# EAGLE board pcb_rt4_transmitter (EAGLE 6.5.0)
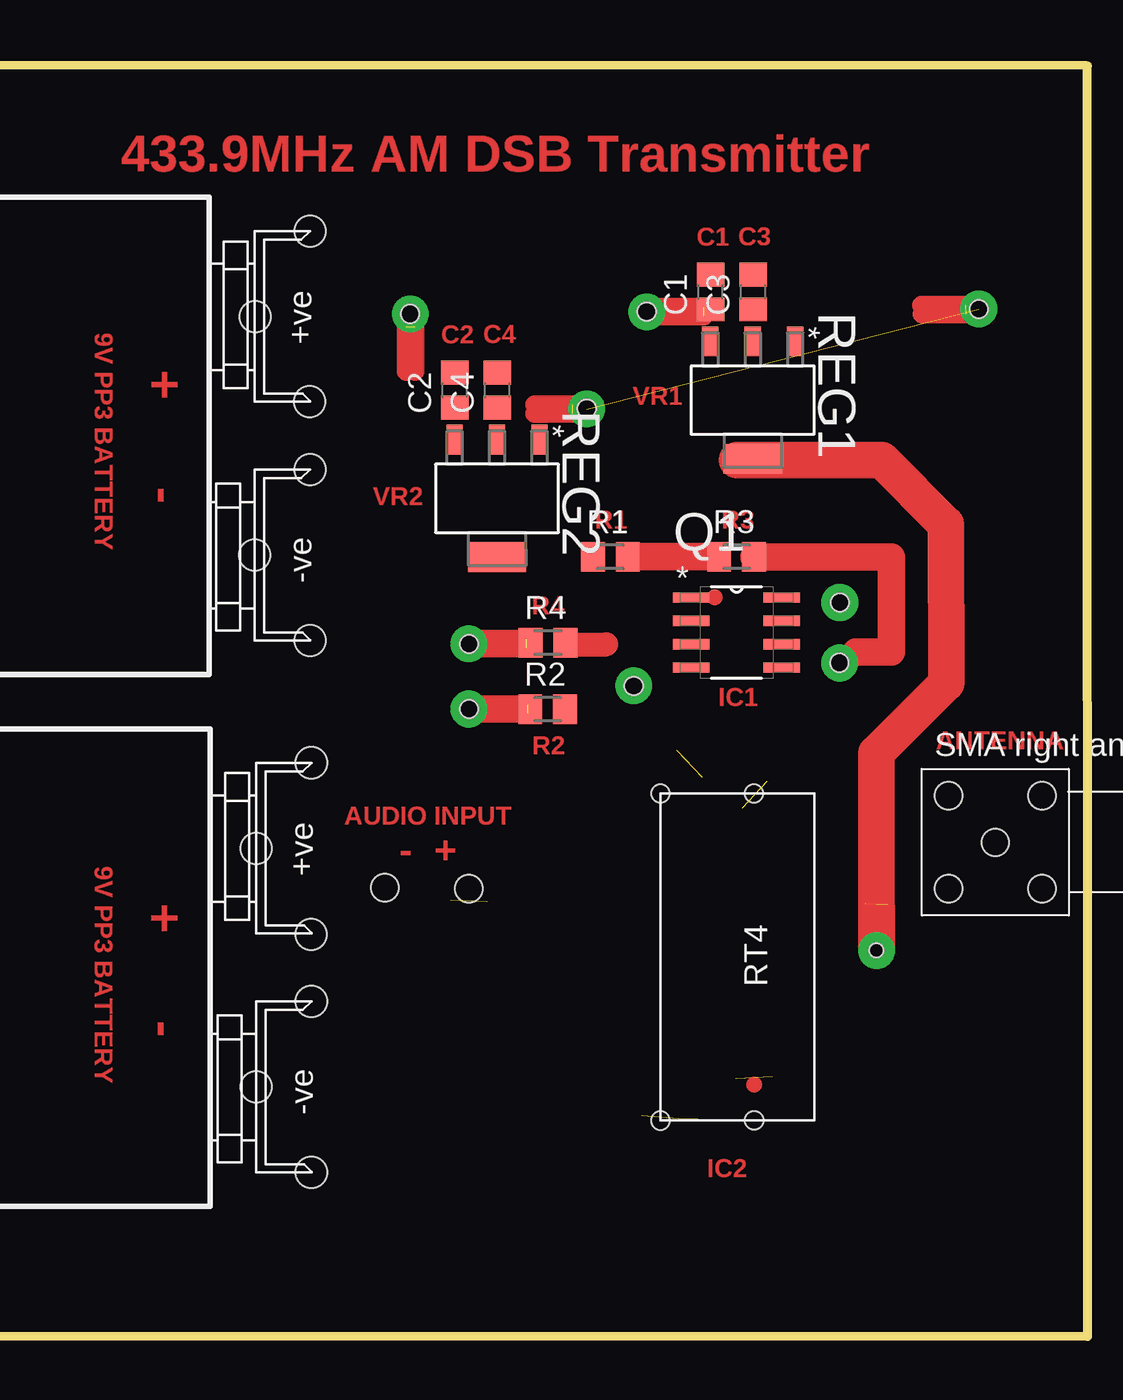
[diagram p0: board, top side]
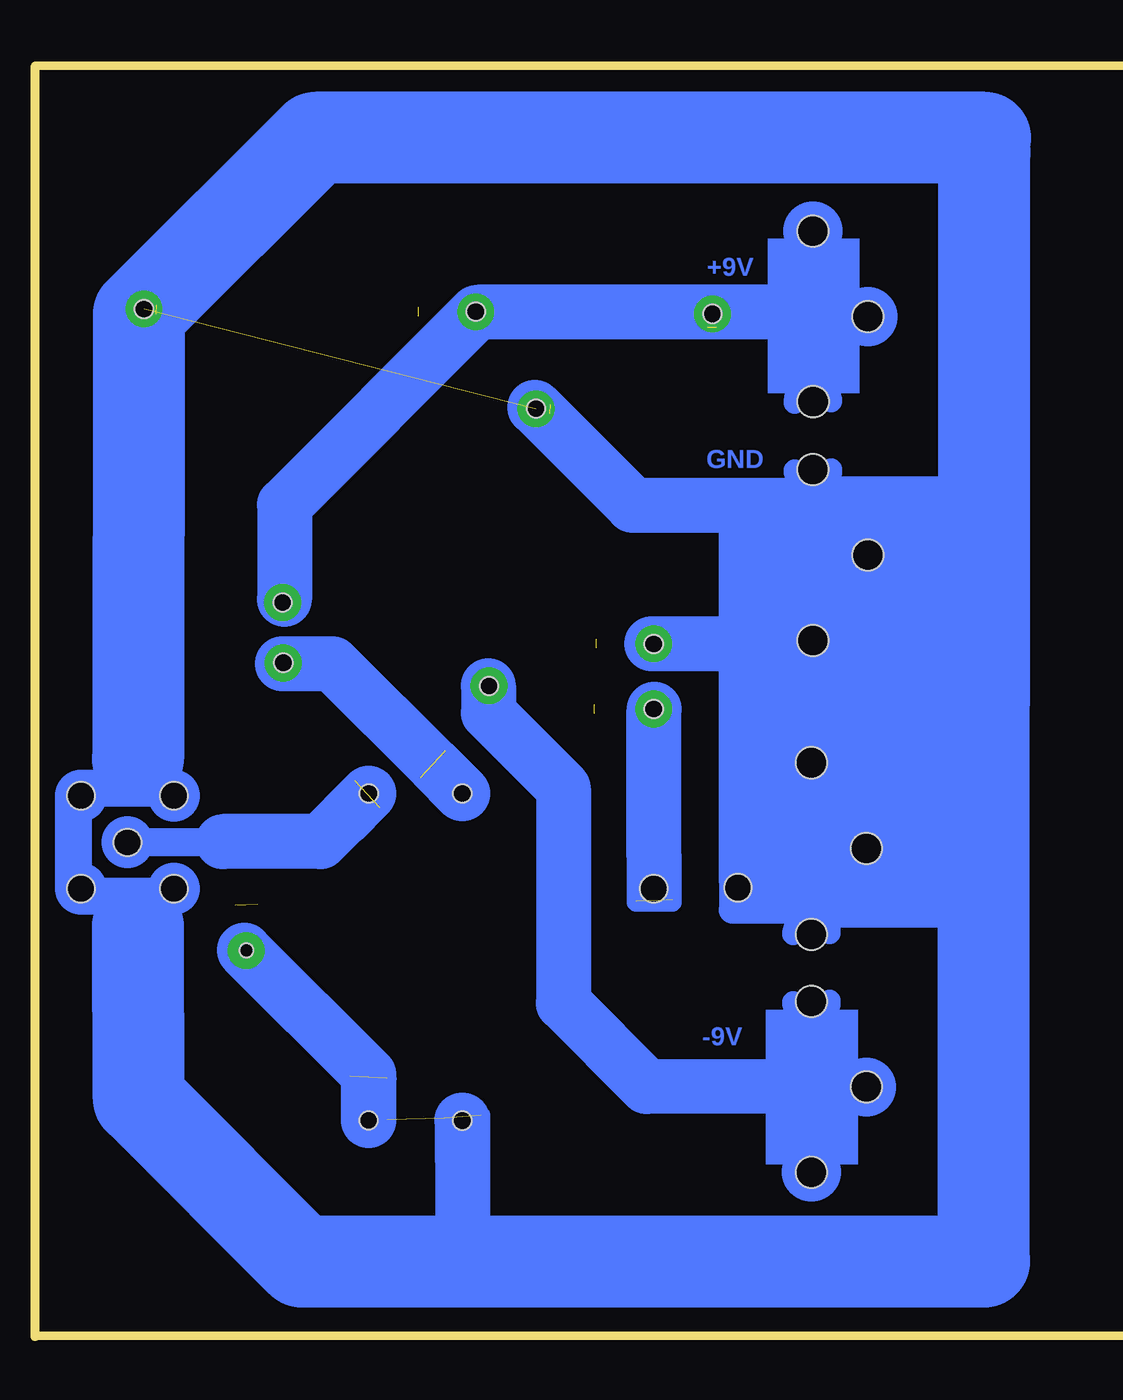
[diagram p1: board, bottom side, seen from below]

No outline drawn. Coordinates in mm, seen from the top.
Copper layers (1*16): Top 0.035mm / dielectric 1.5mm / Bottom 0.035mm
Design rules "default": minimum track width 10mil, minimum drill 24mil, track to track 8mil, track to pad 8mil, pad to pad 8mil, via to via 8mil, smd to smd 8mil, copper to edge 40mil, drill to drill 8mil, minimum pad ring 10mil, minimum via ring 8mil, stop-mask expansion 4mil, vias tented up to drill 0mil, thermal gap 10mil
Holes 1 mm at 40.17,32.71 45.26,32.71 40.17,14.89 45.28,14.9 39.43,58.94 26.54,58.83 36.16,53.66 57.51,59.09 49.95,43.1 49.92,39.82 38.72,38.56 29.74,37.31 29.74,40.85
Holes 0.75 mm at 51.93,24.16
Holes 1.5 mm at 55.87,27.51 55.87,32.59 60.95,32.59 60.95,27.51 58.41,30.04 25.16,27.57 29.74,27.51
Holes 1.7 mm at 21.06,54.05 18.09,58.68 21.08,63.34 21.16,12.08 18.16,16.72 21.16,21.38 18.07,45.68 21.08,41.04 21.08,50.35 18.16,29.71 21.15,25.04 21.16,34.38
vRestrict: area 12.3,6.4 to 24.3,69.5; area 25.4,25.2 to 36.3,32.1; area 47.2,16.4 to 56.4,37.5; area 65.6,29.3 to 76.2,41.8; area 27.2,7.3 to 36.8,24
Milling: 4 lines

## Footprints (pad centres in the part's own frame; a part is rotated, then mirrored left to right if it is on the bottom)
C0805 = smd 1.3 x 1.5: 1 -0.95,0; 2 0.95,0
SOIC127P600X175-8N = smd 1.981 x 0.559: 1 -2.464,1.905; 2 -2.464,0.635; 3 -2.464,-0.635; 4 -2.464,-1.905; 5 2.464,-1.905; 6 2.464,-0.635; 7 2.464,0.635; 8 2.464,1.905
M0805 = smd 1.3 x 1.6: 1 -0.95,0; 2 0.95,0
SOT230P700X180-4N = smd 1.626 x 0.889: 1 -3.2,2.311; 2 -3.2,0; 3 -3.2,-2.311 | smd 1.626 x 3.175: 4 3.2,0

## Placement (x,y rotation side)
C1  2.2uF  [C0805]  42.9,60.02 90 top
C2  2.2uF  [C0805]  28.97,54.67 90 top
C3  1uF  [C0805]  45.22,60.02 90 top
C4  1uF  [C0805]  31.29,54.67 90 top
E$1  [RT4]  43.57,23.91 270 top
E$2  [PP3_TERMINALS]  21.08,52.19 90 top
E$3  [SMA_SOCKET]  58.41,30.05 180 top
E$4  [PP3_TERMINALS]  21.16,23.23 90 top
Q1  UA741  [SOIC127P600X175-8N]  44.32,41.47 0 top
R1  1k  [M0805]  37.44,45.59 0 top
R2  1k  [M0805]  34.03,37.29 0 top
R3  1k  [M0805]  44.32,45.6 0 top
R4  5k6  [M0805]  34.05,40.92 0 top
REG1  5V  [SOT230P700X180-4N]  45.2,54.13 270 top
REG2  3V3  [SOT230P700X180-4N]  31.27,48.78 270 top

## Library data of the parts
C1-C4 R1-R4 = smd-ipc
E$1-E$4 Q1 REG1 REG2 = lbr

## Tracks (layer width: path | path; a pad name or v marks a point on that pad's centre or on a via)
S$1
  Bottom 3: 34.67,32.98 34.67,21.29 30.13,16.75 22.64,16.79
S$2
  Bottom 3: 49.98,39.78 47.26,39.78 41.58,34.12
S$3  (via drill 0.5 pad 2)
  other vias: 49.95,43.1
S$4
  Bottom 3: 20.33,58.91 39.35,58.92
S$5
  Bottom 3: 46.69,31.29 47.9,30.09 53.21,30.09
S$6  (via drill 0.5 pad 2)
  other vias: 51.94,24.15
S$7
  Bottom 3: 52.05,24.17 45.26,17.39 45.29,16.88
S$8  (via drill 0.5 pad 2)  (1 unrouted)
  other vias: 36.16,53.65 57.51,59.09
S$9  (via drill 0.5 pad 2)
  other vias: 39.43,58.94
S$10
  Top 1.5: 45.26,45.59 52.76,45.59 52.76,40.41 50.82,40.41
S$11  (1 unrouted)
  Top 1: 42.55,59.18 40.13,59.18 | 42.55,58.7 40.13,58.7
S$12
  Bottom 3: 39.41,58.87 49.86,48.42 49.86,43.27
S$13  (via drill 0.5 pad 2)
  other vias: 49.93,39.81
S$14  (1 unrouted)
  Bottom 1: 30.72,29.25 30.72,26.82 | 28.72,29.3 28.72,26.8
S$15  (1 unrouted)
  Top 1: 56.81,59.3 54.39,59.3 | 56.83,58.8 54.41,58.8
S$16
  Top 2: 44.34,50.85 52.24,50.85 55.69,47.39
S$17
  Bottom 3: 40.16,12.88 40.16,8.33
S$18
  Bottom 5: 11.76,7.29 11.73,67.62
S$19  (via drill 0.5 pad 2)
  other vias: 29.74,37.31
S$20  (via drill 0.5 pad 2)
  other vias: 29.74,40.86
S$21
  Bottom 3: 36.22,53.74 30.88,48.4 20.69,48.4
S$22  (1 unrouted)
  Top 1: 32.97,37.55 30.55,37.55 | 32.97,37.07 30.55,37.07
S$23
  Bottom 5: 11.74,7.2 48.92,7.2 57.57,15.88
S$24  (via drill 0.5 pad 2)
  other vias: 26.55,58.83
S$25
  Top 1.3: 35.07,40.83 37.22,40.82
S$26
  Bottom 5: 57.79,16.07 57.83,25.49
S$27  (1 unrouted)
  Top 1: 26.33,58.09 26.33,55.67 | 26.82,58.09 26.82,55.67
S$28  (1 unrouted)
  Top 1: 32.87,41.11 30.45,41.11 | 32.87,40.63 30.45,40.63
S$29
  Top 2: 51.93,34.87 51.93,25.7
S$30
  Top 2: 51.93,34.9 55.74,38.71 55.73,47.37
S$31  (1 unrouted)
  Top 1: 35.37,53.88 33.31,53.88 | 35.39,53.4 33.31,53.4
S$32
  Bottom 5: 11.7,68.42 48.16,68.42 57.57,59.02
S$33
  Top 1.5: 38.49,45.61 43.28,45.61
S$34
  Bottom 3: 29.84,40.86 23.05,40.86
S$35
  Bottom 3: 29.72,29.21 29.73,37.28
S$36
  Bottom 5: 57.79,58.83 57.83,34.59
S$37  (1 unrouted)
  Top 0.75: 51.31,26.7 51.31,24.28 | 52.55,26.64 52.55,24.22
S$38  (via drill 0.5 pad 2)
  other vias: 38.71,38.57
S$39
  Bottom 3: 38.75,38.58 38.75,37.09 34.75,33.09
S$40
  Bottom 1.5: 23.77,26.37 25.45,26.37
S$41
  Bottom 0.5: 25.95,28.6 25.94,26.41
S$42
  Bottom 0.5: 25.17,28.07 24.92,28.03 24.81,27.91 24.68,27.72 24.68,27.5 24.74,27.3
S$43
  Bottom 1: 28.73,26.77 30.71,26.77
S$44
  Bottom 0.5: 29.75,28.01 29.5,27.97 29.39,27.85 29.26,27.66 29.26,27.44 29.32,27.24
S$45
  Bottom 0.5: 24.73,27.32 24.91,27.14 25.12,27.06 25.27,27.08 25.43,27.12 25.62,27.31 25.67,27.46 25.68,27.63 25.63,27.8 25.5,27.97 25.33,28.05 25.13,28.07
S$46
  Bottom 0.5: 29.31,27.26 29.49,27.08 29.7,27 29.85,27.02 30.01,27.06 30.2,27.25 30.25,27.4 30.26,27.57 30.21,27.74 30.08,27.91 29.91,27.99 29.71,28.01
S$60  (1 unrouted)
  Bottom 1: 41.08,35.04 39.43,33.39 | 42.45,33.58 40.8,31.93
S$61  (1 unrouted)
  Bottom 1: 46.01,33.4 47.32,32.08 | 44.65,31.91 45.96,30.59
S$62  (3 unrouted)
  Bottom 1: 44.28,17.2 44.28,14.92 | 46.28,17.3 46.28,15.02 | 39.16,15.18 39.16,12.9 | 41.17,15.01 41.17,12.73
(copper drawn outside any net)
  shapes: Bottom area x13, Top circle x2

## Text on the board
Top: 433.9MHz AM DSB Transmitter | C1 | C3 | C2 | C4 | VR1 | 9V PP3 BATTERY | + - | VR2 | R1 | R3 | R4 | IC1 | R2 | ANTENNA | AUDIO INPUT | - + | 9V PP3 BATTERY | + - | IC2
Bottom: +9V | GND | -9V